# EAGLE board shield_ard_sar2 (EAGLE 9.3.0)
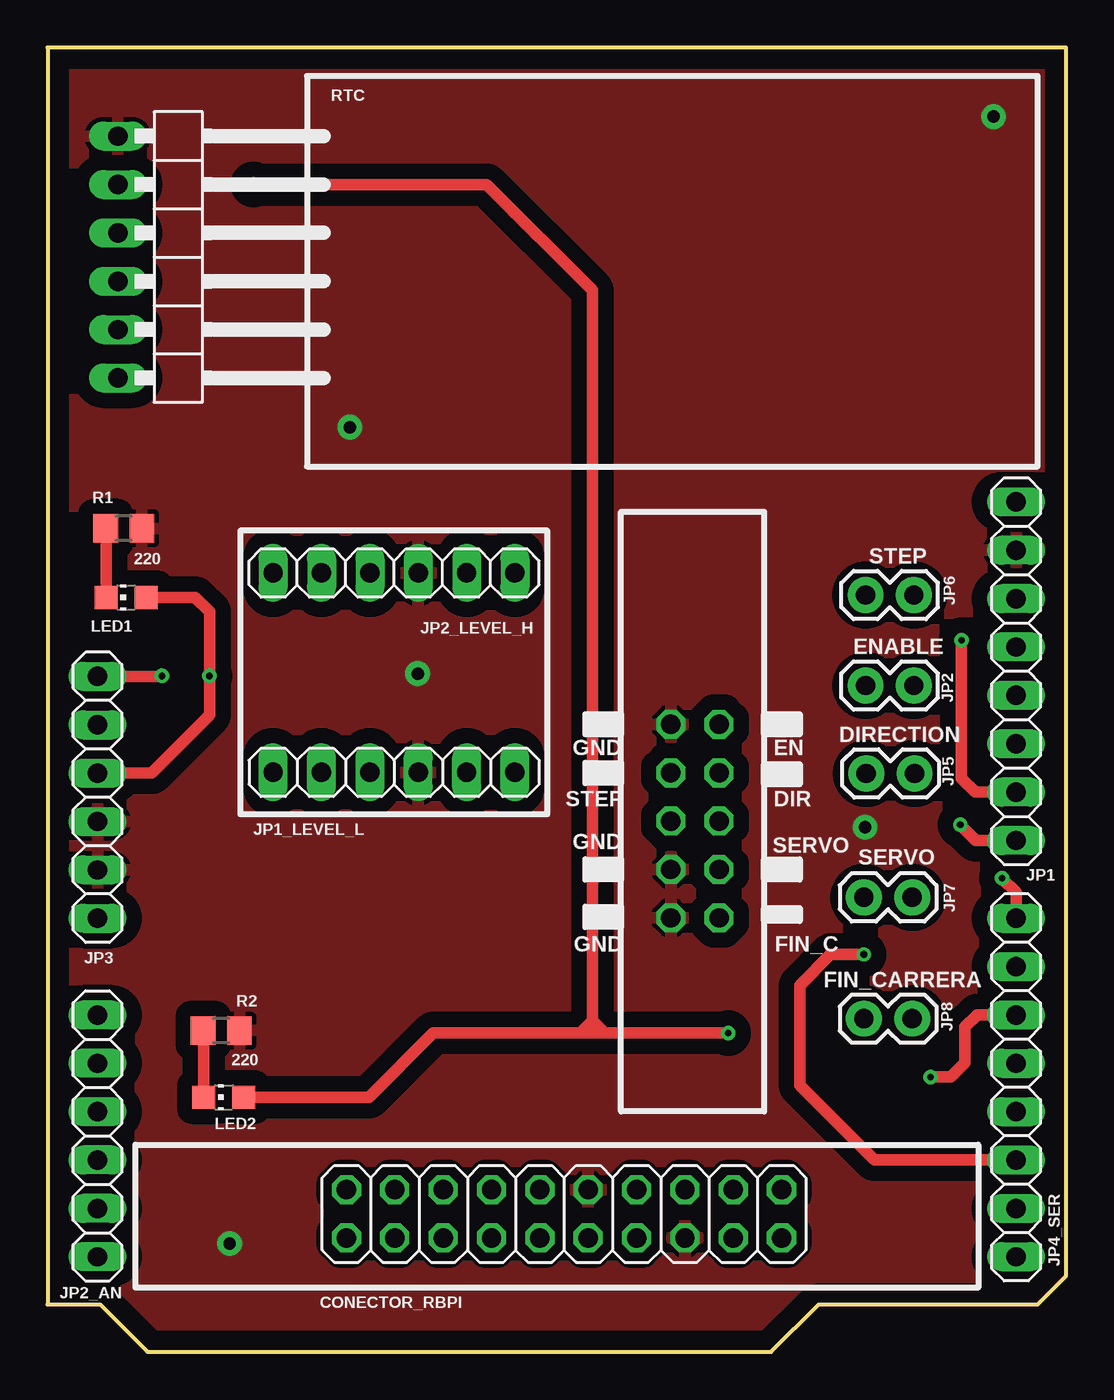
[diagram p0: board, top side]
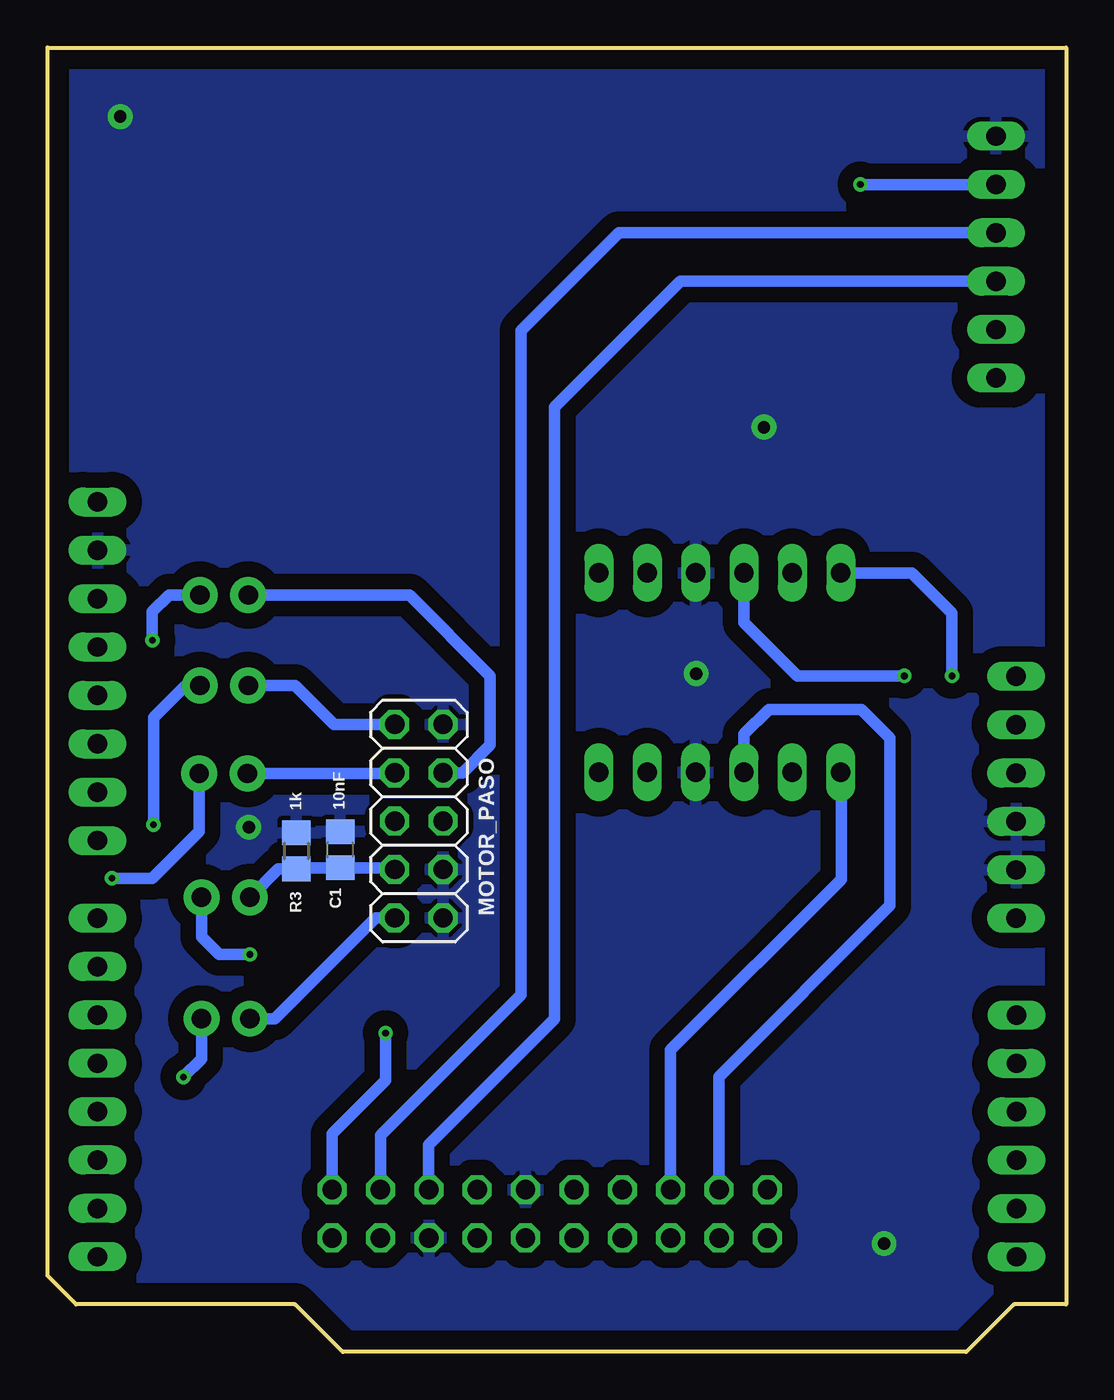
[diagram p1: board, bottom side, seen from below]

Size 53.5 x 68.5 mm. Coordinates in mm from the lower left corner, seen from the top.
Outline: 0,2.5 2.75,2.5 5.25,0 38,0 40.5,2.5 52,2.5 53.5,4 53.5,68.5 0,68.5 0,2.5
Copper layers (1*16): Top 0.035mm / dielectric 1.5mm / Bottom 0.035mm
Design rules "default": minimum track width 6mil, minimum drill 0.35mm, track to track 6mil, track to pad 6mil, pad to pad 6mil, via to via 6mil, smd to smd 6mil, copper to edge 40mil, drill to drill 6mil, minimum pad ring 10mil, minimum via ring 8mil, stop-mask expansion 4mil, vias tented up to drill 0mil, thermal gap 10mil

## Footprints (pad centres in the part's own frame; a part is rotated, then mirrored left to right if it is on the bottom)
C0805 = smd 1.3 x 1.5: 1 -0.95,0; 2 0.95,0
2X10 = drill 1.016 octagon: 1 -11.43,-1.27; 2 -11.43,1.27; 3 -8.89,-1.27; 4 -8.89,1.27; 5 -6.35,-1.27; 6 -6.35,1.27; 7 -3.81,-1.27; 8 -3.81,1.27; 9 -1.27,-1.27; 10 -1.27,1.27; 11 1.27,-1.27; 12 1.27,1.27; 13 3.81,-1.27; 14 3.81,1.27; 15 6.35,-1.27; 16 6.35,1.27; 17 8.89,-1.27; 18 8.89,1.27; 19 11.43,-1.27; 20 11.43,1.27
1X08 = drill 1.016 long: 1 -8.89,0; 2 -6.35,0; 3 -3.81,0; 4 -1.27,0; 5 1.27,0; 6 3.81,0; 7 6.35,0; 8 8.89,0
1X06 = drill 1.016 long: 1 -6.35,0; 2 -3.81,0; 3 -1.27,0; 4 1.27,0; 5 3.81,0; 6 6.35,0
1X02 = drill 1.016 pad 1.88: 1 0,0; 2 2.54,0
CHIP-LED0805 = smd 1.2 x 1.2: A 0,-1.05; C 0,1.05
2X05 = drill 1.016 octagon: 1 -5.08,-1.27; 2 -5.08,1.27; 3 -2.54,-1.27; 4 -2.54,1.27; 5 0,-1.27; 6 0,1.27; 7 2.54,-1.27; 8 2.54,1.27; 9 5.08,-1.27; 10 5.08,1.27
R0805 = smd 1.3 x 1.5: 1 -0.95,0; 2 0.95,0
1X06/90 = drill 1.016 long: 1 -6.35,-3.81; 2 -3.81,-3.81; 3 -1.27,-3.81; 4 1.27,-3.81; 5 3.81,-3.81; 6 6.35,-3.81

## Placement (x,y rotation side)
C1  10nF  [C0805]  38.12,26.38 90 bottom
CONECTOR_RBPI  [2X10]  27.12,7.25 0 top
JP1  [1X08]  50.88,35.75 90 top
JP1_LEVEL_L  [1X06]  18.2,30.44 0 top
JP2  [1X02]  45.5,35 180 top
JP2_AN  [1X06]  2.62,11.35 90 top
JP2_LEVEL_H  [1X06]  18.2,40.91 180 top
JP3  [1X06]  2.62,29.12 270 top
JP4_SER  [1X08]  50.88,13.88 270 top
JP5  [1X02]  43,30.38 0 top
JP6  [1X02]  45.5,39.75 180 top
JP7  [1X02]  42.88,23.88 0 top
JP8  [1X02]  42.88,17.5 0 top
LED1  [CHIP-LED0805]  4.12,39.62 90 top
LED2  [CHIP-LED0805]  9.25,13.38 90 top
MOTOR_PASO  [2X05]  34,27.88 270 bottom
R1  220  [R0805]  4,43.25 180 top
R2  220  [R0805]  9.12,16.88 180 top
R3  1k  [R0805]  40.44,26.31 270 bottom
RTC  [1X06/90]  7.5,57.5 270 top

## Library data of the parts
C1 = eagle-ltspice; SPICEMODEL: NONE; SPICEPREFIX: C
CONECTOR_RBPI JP1 JP1_LEVEL_L JP2_AN JP2_LEVEL_H JP3 JP4_SER MOTOR_PASO RTC = pinhead
JP2 JP5-JP8 = SparkFun-Retired
LED1 LED2 = led
R1-R3 = rcl; SPICEPREFIX: R

## Nets
0: JP4_SER.8
1: JP4_SER.7
3: JP4_SER.5
3V3: JP3.2
4: JP4_SER.4
6: JP4_SER.2
10: JP1.3
11: JP1.4
12: JP1.5
13: JP1.6
A0: JP2_AN.1
A1: JP2_AN.2
A2: JP2_AN.3
A3: JP2_AN.4
A4: JP2_AN.5
A5: JP2_AN.6
AREF: JP1.8
DIR: JP4_SER.1 JP5.2
DIR*: JP5.1 MOTOR_PASO.3
EN: JP1.1 JP2.1
EN*: JP2.2 MOTOR_PASO.1
GND: C1.2 CONECTOR_RBPI.12 CONECTOR_RBPI.15 JP1.7 JP1_LEVEL_L.4 JP2_LEVEL_H.3 JP3.4 JP3.5 MOTOR_PASO.2 MOTOR_PASO.8 MOTOR_PASO.10 R1.1 R2.1 R3.1 RTC.1
HV1_RST: JP2_LEVEL_H.6 JP3.1
HV2: JP2_LEVEL_H.5
HV3: JP2_LEVEL_H.2
HV4: JP2_LEVEL_H.1
HV_5V: JP2_LEVEL_H.4 JP3.3 LED1.A
LV: CONECTOR_RBPI.4 JP1_LEVEL_L.3
LV1: CONECTOR_RBPI.6 JP1_LEVEL_L.1
LV2: JP1_LEVEL_L.2
LV3: JP1_LEVEL_L.5
LV4: JP1_LEVEL_L.6
N$2: LED1.C R1.2
N$3: LED2.C R2.2
N$17: CONECTOR_RBPI.2
N$19: CONECTOR_RBPI.1
N$20: CONECTOR_RBPI.3
N$21: CONECTOR_RBPI.5
N$22: CONECTOR_RBPI.7
N$23: CONECTOR_RBPI.9
N$24: CONECTOR_RBPI.11
N$25: CONECTOR_RBPI.13
N$27: CONECTOR_RBPI.17
N$28: CONECTOR_RBPI.19
N$30: CONECTOR_RBPI.8
N$31: CONECTOR_RBPI.10
N$33: CONECTOR_RBPI.14
N$41: RTC.5
N$42: RTC.6
ND5: JP3.6
SCL: CONECTOR_RBPI.16 RTC.4
SDA: CONECTOR_RBPI.18 RTC.3
SENSR: JP4_SER.3 JP8.2
SENSR*: JP8.1 MOTOR_PASO.9
SERVO: JP4_SER.6 JP7.2
SERVO*: C1.1 JP7.1 MOTOR_PASO.7 R3.2
STEP: JP1.2 JP6.1
STEP*: JP6.2 MOTOR_PASO.4
VCC_RBPI: CONECTOR_RBPI.20 LED2.A RTC.2

## Tracks (layer width: path | path; a pad name or v marks a point on that pad's centre or on a via)
DIR  (via drill 0.35)
  Top 0.61: JP4_SER.1 50.88,24.12 v50.12,24.88
  Bottom 0.61: JP5.2 45.54,27.34 48,24.88 v50.12,24.88
DIR*
  Bottom 0.61: JP5.1 35.31,30.38 MOTOR_PASO.3
EN  (via drill 0.35)
  Top 0.61: v47.94,27.69 48.77,26.86 JP1.1
  Bottom 0.61: JP2.1 46.25,35 47.94,33.31 v47.94,27.69
EN*
  Bottom 0.61: JP2.2 40.5,35 38.45,32.95 MOTOR_PASO.1
GND  (via drill 0.65 pad 1.3)
  other vias: 15.88,48.56 49.69,64.88 9.56,5.69 19.44,35.62 42.94,27.56
  pour Top (isolate 0.813): -1.62,70.12 55.12,70.12 55.12,-1.75 -1.62,-1.75
  pour Bottom (isolate 0.813): -3,71.75 56.5,71.75 56.5,-3.62 -3,-3.62
HV1_RST  (via drill 0.35)
  Top 0.61: JP3.1 5.97,35.48 v6,35.5
  Bottom 0.61: JP2_LEVEL_H.6 8.1,40.91 6,38.81 v6,35.5
HV_5V  (via drill 0.35)
  Top 0.61: LED1.A 7.75,39.62 8.5,38.88 v8.5,35.5 8.5,33.44 5.46,30.39 JP3.3
  Bottom 0.61: 2.65,30.38 JP3.3 | v8.5,35.5 14.12,35.5 16.94,38.31 16.94,40.9 JP2_LEVEL_H.4
LV
  Bottom 0.61: CONECTOR_RBPI.4 18.23,14.45 9.25,23.44 9.25,32.25 10.75,33.75 15.62,33.75 16.93,32.45 JP1_LEVEL_L.3
LV1
  Bottom 0.61: CONECTOR_RBPI.6 20.77,15.85 11.81,24.81 11.81,30.41 JP1_LEVEL_L.1
N$2
  Top 0.61: LED1.C 3.08,43.23 R1.2
N$3
  Top 0.61: LED2.C 8.2,16.85 R2.2
SCL
  Bottom 0.61: RTC.4 20.27,56.23 26.88,49.62 26.88,17.5 33.5,10.88 33.5,8.54 CONECTOR_RBPI.16
SDA
  Bottom 0.61: RTC.3 23.48,58.77 28.62,53.62 28.62,18.75 36,11.38 36,8.54 CONECTOR_RBPI.18
SENSR  (via drill 0.35)
  Top 0.61: v46.38,14.44 47.44,14.44 48.19,15.19 48.19,17.06 48.82,17.7 JP4_SER.3
  Bottom 0.61: JP8.2 45.41,15.4 v46.38,14.44
SENSR*
  Bottom 0.61: MOTOR_PASO.9 36.27,22.8 41.56,17.5 JP8.1
SERVO  (via drill 0.35)
  Top 0.61: v42.88,20.88 41.12,20.88 39.5,19.25 39.5,14 43.42,10.07 JP4_SER.6
  Bottom 0.61: JP7.2 45.41,21.79 44.5,20.88 v42.88,20.88
SERVO*
  Bottom 0.61: JP7.1 41.39,25.36 R3.2 40.38,25.43 C1.1 35.36,25.43 MOTOR_PASO.7
STEP  (via drill 0.35)
  Top 0.61: JP1.2 48.73,29.4 48,30.12 v48,37.38
  Bottom 0.61: JP6.1 47.12,39.75 48,38.88 v48,37.38
STEP*
  Bottom 0.61: MOTOR_PASO.4 31.71,30.41 30.25,31.88 30.25,35.5 34.5,39.75 JP6.2
VCC_RBPI  (via drill 0.35)
  Top 0.61: v10.81,61.31 23.07,61.31 28.62,55.75 28.62,17.38 | LED2.A 16.88,13.38 20.25,16.75 29.25,16.75 | v35.75,16.75 29.25,16.75 | 28.62,17.38 29.25,16.75 | 28,16.75 28.62,17.38
  Bottom 0.61: CONECTOR_RBPI.20 38.55,11.45 35.75,14.25 v35.75,16.75 | v10.81,61.31 RTC.2

## Text on the board
tPlace: STEP | ENABLE | DIRECTION | GND | EN | STEP | DIR | GND | SERVO | SERVO | GND | FIN_C | FIN_CARRERA